# EAGLE board piezo-preamp-tickler (EAGLE 7.5.0)
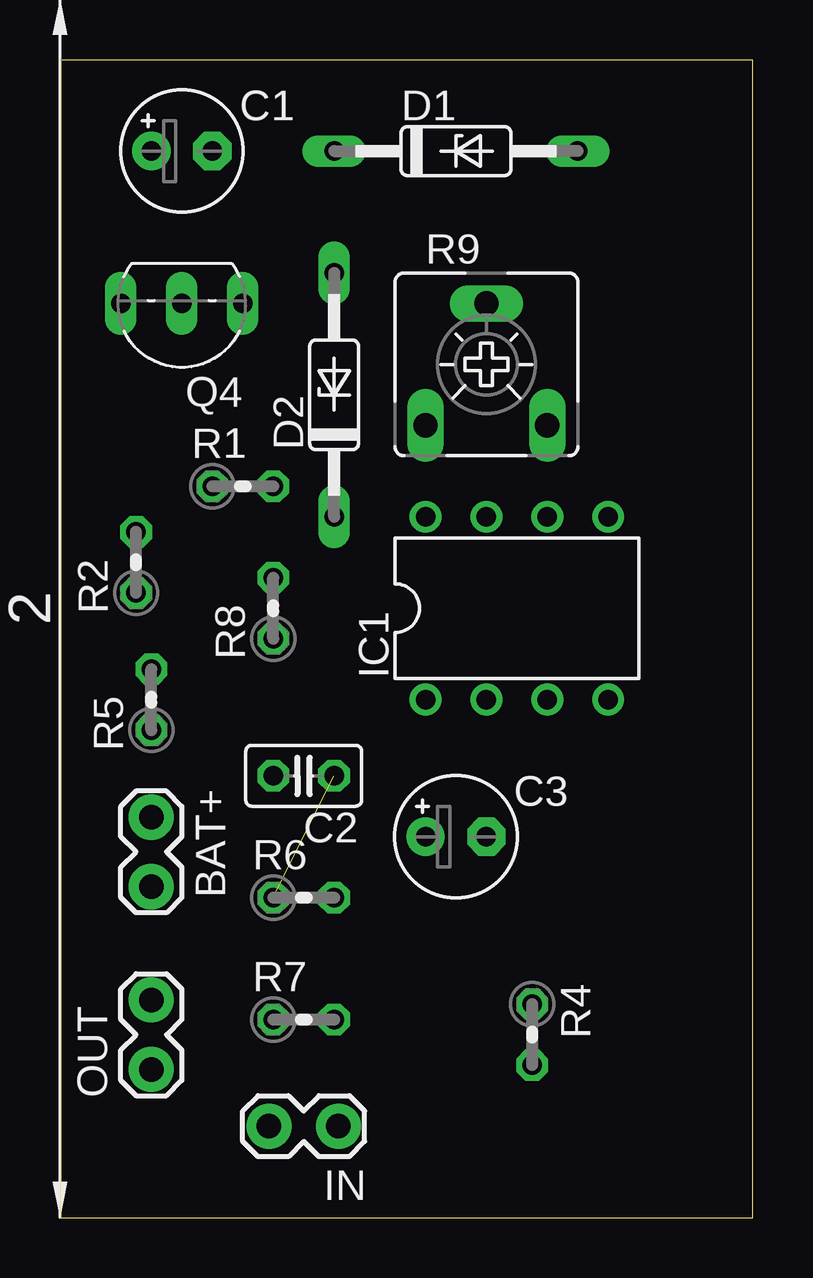
[diagram p0: board, top side]
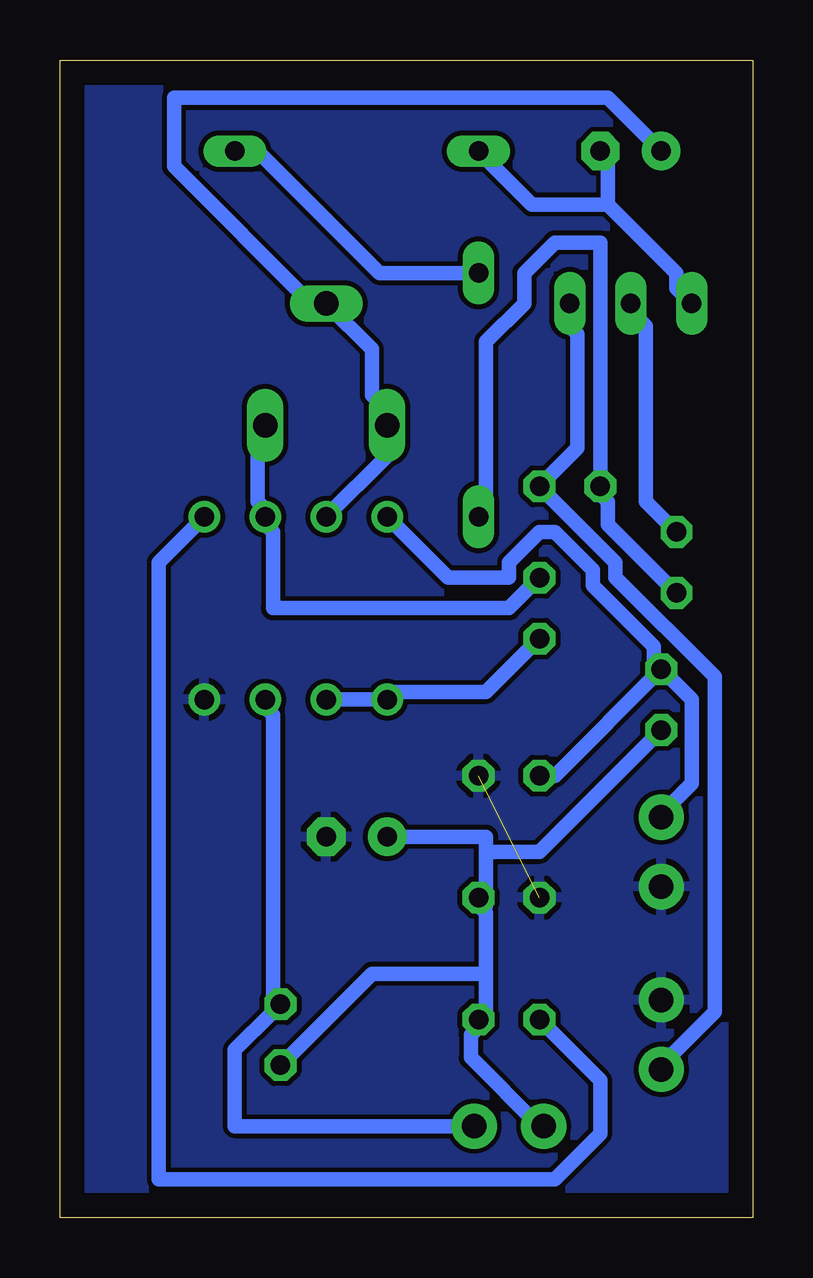
[diagram p1: board, bottom side, seen from below]

Size 28.88 x 48.25 mm. Coordinates in mm from the lower left corner, seen from the top.
Outline: 0,0 28.88,0 28.88,48.25 0,48.25 0,0
Copper layers (1*16): Top 0.035mm / dielectric 1.5mm / Bottom 0.035mm
Design rules "default": minimum track width 10mil, minimum drill 24mil, track to track 8mil, track to pad 8mil, pad to pad 8mil, via to via 8mil, smd to smd 8mil, copper to edge 40mil, drill to drill 8mil, minimum pad ring 10mil, minimum via ring 8mil, stop-mask expansion 4mil, vias tented up to drill 0mil, thermal gap 10mil
Net classes: 0 default: width 0.6 mm, clearance 0.1 mm

## Footprints (pad centres in the part's own frame; a part is rotated, then mirrored left to right if it is on the bottom)
1X02_LOCK = drill 1.016 pad 1.88: 1 -0.178,0; 2 2.718,0
E2,5-5 = drill 0.813 pad 1.6: + -1.27,0 | drill 0.813 pad 1.6 octagon: - 1.27,0
C025-025X050 = drill 0.813 octagon: 1 -1.27,0; 2 1.27,0
DO35Z10 = drill 0.813 long: A 5.08,0; C -5.08,0
DIL08 = drill 0.813 pad 1.27: 1 -3.81,-3.81; 2 -1.27,-3.81; 3 1.27,-3.81; 4 3.81,-3.81; 5 3.81,3.81; 6 1.27,3.81; 7 -1.27,3.81; 8 -3.81,3.81
TO92- = drill 0.813 long: 1 2.54,0; 2 0,0; 3 -2.54,0
0204V = drill 0.813 octagon: 1 -1.27,0; 2 1.27,0
CA6V = drill 1.016 long: A -2.54,-2.54; E 2.54,-2.54; S 0,2.54

## Placement (x,y rotation side)
BAT+  [1X02_LOCK]  3.81,16.51 270 top
C1  10u  [E2,5-5]  5.08,44.45 0 top
C2  100n  [C025-025X050]  10.16,18.41 180 top
C3  10u  [E2,5-5]  16.51,15.88 0 top
D1  [DO35Z10]  16.51,44.45 0 top
D2  [DO35Z10]  11.43,34.29 90 top
IC1  TLC272  [DIL08]  19.05,25.4 0 top
IN  [1X02_LOCK]  11.43,3.81 180 top
OUT  [1X02_LOCK]  3.81,6.35 90 top
Q4  2N5484  [TO92-]  5.08,38.1 180 top
R1  10K  [0204V]  7.62,30.48 0 top
R2  0.3  [0204V]  3.17,27.3 90 top
R4  10k..10m  [0204V]  19.68,7.62 270 top
R5  150K  [0204V]  3.81,21.59 90 top
R6  100K  [0204V]  10.16,13.34 0 top
R7  1K  [0204V]  10.16,8.26 0 top
R8  1K  [0204V]  8.89,25.4 90 top
R9  [CA6V]  17.78,35.56 0 top

## Library data of the parts
BAT+ OUT = CMU-ArtFab
C1-C3 = rcl
D1 D2 = diode
IC1 = linear
IN = SparkFun-Connectors
Q4 = transistor-fet
R1 R2 R4-R8 = resistor
R9 = pot

## Nets
GND: BAT+.2 C2.1 C3.- IC1.4 OUT.2 R6.1
N$1: D1.A D2.A
N$2: OUT.1 Q4.3 R1.2
N$3: Q4.2 R2.2
N$5: IC1.5 R7.1
N$6: C1.+ IC1.7 R9.A R9.S
N$7: IC1.6 R8.2 R9.E
N$8: C3.+ IN.2 R4.2 R5.1 R6.2 R7.2
N$9: IC1.3 IN.1 R4.1
N$10: C1.- D1.C Q4.1
N$14: IC1.1 IC1.2 R8.1
R3: D2.C R1.1 R2.1
V9V: BAT+.1 C2.2 IC1.8 R5.2

## Tracks (layer width: path | path; a pad name or v marks a point on that pad's centre or on a via)
GND  (1 unrouted)
  pour Bottom: 0,48.26 29.21,48.26 29.21,0 0,0
N$1
  Bottom 0.6: D2.A 15.56,39.37 20.64,44.45 D1.A
N$2
  Bottom 0.6: Q4.3 7.62,37.15 7.3,36.83 7.3,32.07 R1.2 8.57,30.48 8.57,30.16 5.71,27.3 5.71,26.67 1.59,22.54 1.59,8.57 3.81,6.35 OUT.1
N$3
  Bottom 0.6: R2.2 4.45,29.84 4.45,37.15 5.08,37.78 Q4.2
N$5
  Bottom 0.6: R7.1 6.35,5.71 6.35,3.49 8.26,1.59 24.77,1.59 24.77,27.3 23.18,28.89 22.86,28.89 IC1.5
N$6
  Bottom 0.6: IC1.7 15.24,31.75 R9.A 15.24,33.66 15.88,34.29 15.88,36.2 R9.S 18.41,38.1 24.13,43.81 24.13,46.67 6.03,46.67 C1.+
N$7
  Bottom 0.6: R8.2 10.16,25.4 20,25.4 20,28.57 20.32,28.89 IC1.6 20.32,29.53 20.64,29.84 20.64,32.7 R9.E
N$8
  Bottom 0.6: 11.11,10.16 11.11,12.7 11.43,13.02 R6.2 11.11,13.02 11.11,15.24 | 11.11,10.16 11.11,8.57 R7.2 11.43,7.94 11.75,7.62 11.75,6.67 8.89,3.81 IN.2 | R5.1 8.89,15.24 11.11,15.24 | R4.2 15.88,10.16 11.11,10.16 | C3.+ 11.11,15.88 11.11,15.24
N$9
  Bottom 0.6: IC1.3 20.32,21.27 20,20.95 20,9.21 R4.1 20,8.89 20,8.57 21.59,6.99 21.59,3.81 IN.1
N$10
  Bottom 0.6: Q4.1 3.17,38.73 3.17,39.37 6.03,42.23 | 6.03,42.23 6.03,44.13 C1.- | D1.C 9.21,42.23 6.03,42.23
N$14
  Bottom 0.6: IC1.2 IC1.1 15.24,21.91 11.11,21.91 R8.1
R3
  Bottom 0.6: R2.1 6.03,28.89 6.03,29.84 6.35,30.16 R1.1 6.35,40.64 8.26,40.64 9.53,39.37 9.53,38.1 11.11,36.51 11.11,29.53 D2.C
V9V
  Bottom 0.6: R5.2 8.26,18.41 C2.2 | IC1.8 12.7,26.67 10.16,26.67 10.16,27.3 8.89,28.57 8.26,28.57 6.67,26.99 6.67,26.35 4.13,23.81 4.13,22.86 R5.2 | R5.2 2.54,21.59 2.54,18.1 3.81,16.83 BAT+.1